# Altium PCB PCB3.PcbDoc
Units mm, origin at the board's own origin, x right, y up, seen from the top; angles counter-clockwise.
Board outline 98 x 98 mm, 2 copper layers (Top Layer, Bottom Layer); 32 components, 44 nets, 143 pads, 17 vias.
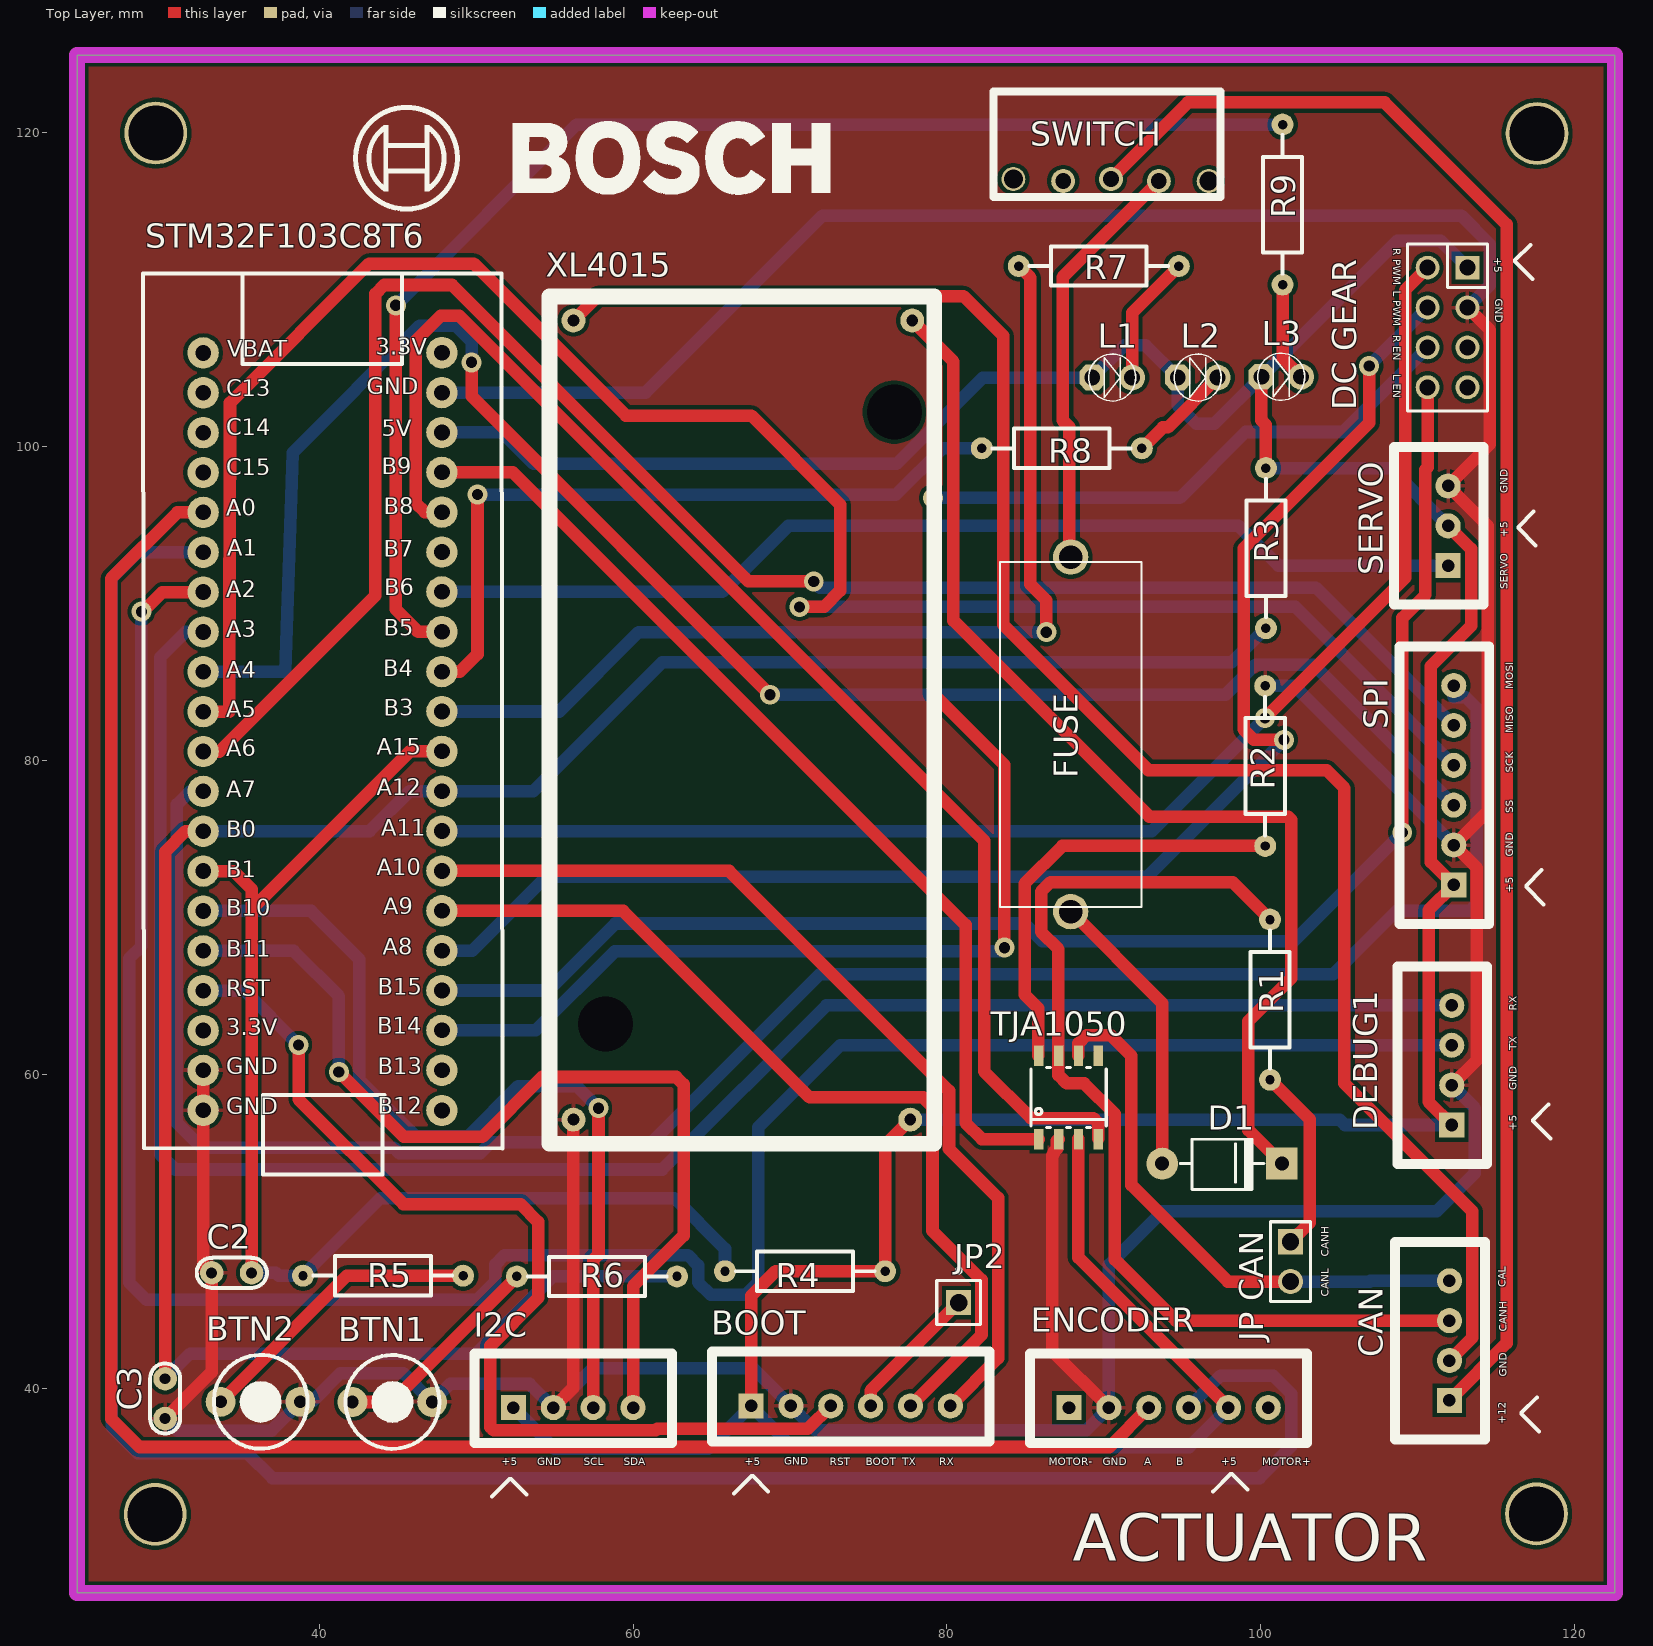
[diagram p0: Top Layer view]
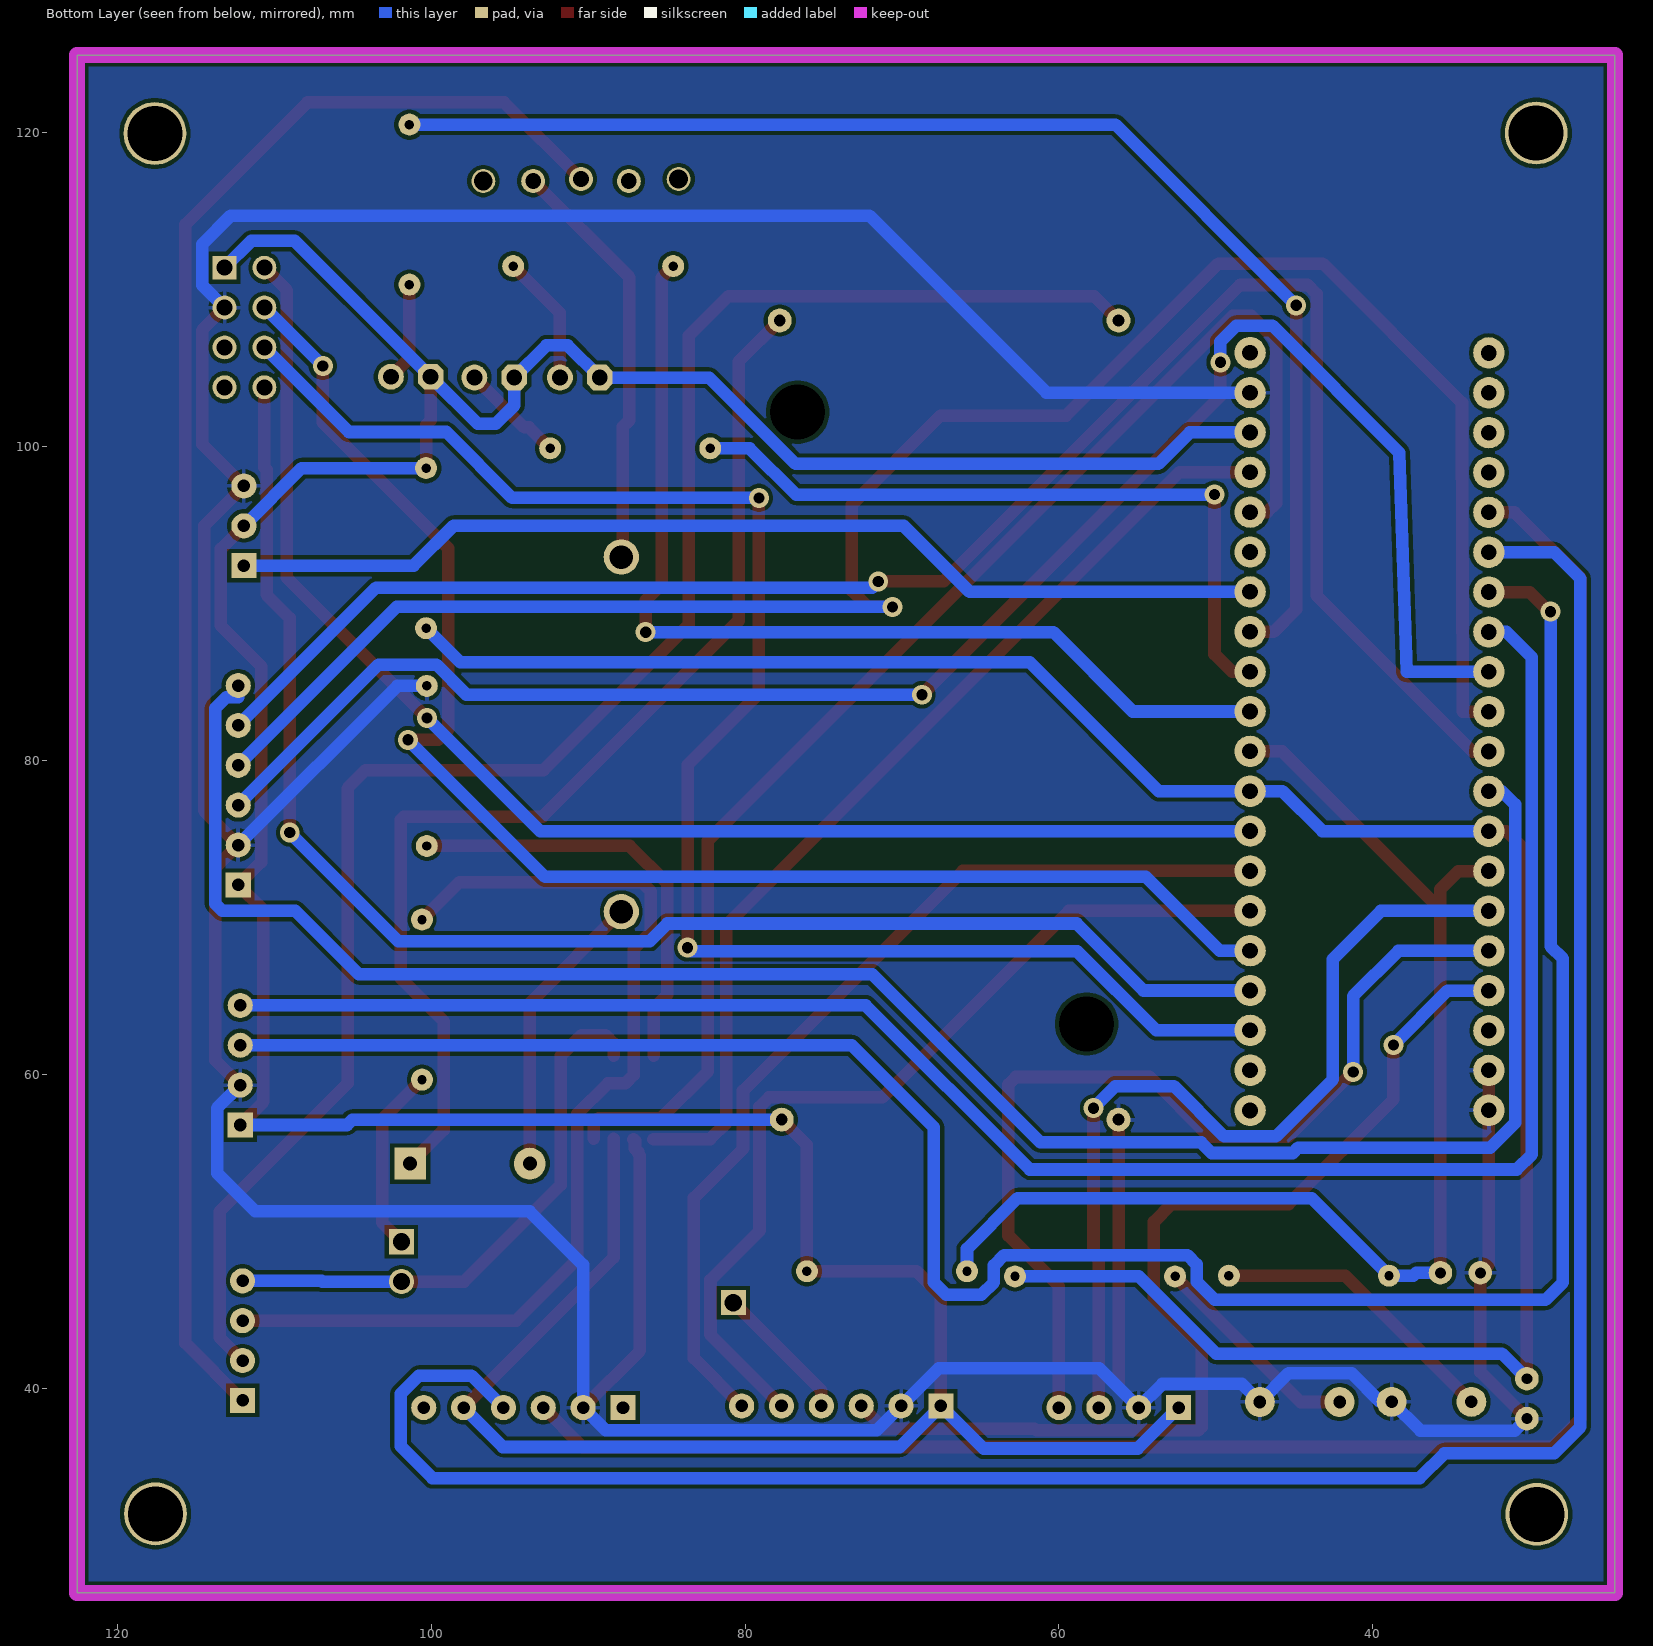
[diagram p1: Bottom Layer view, seen from below]
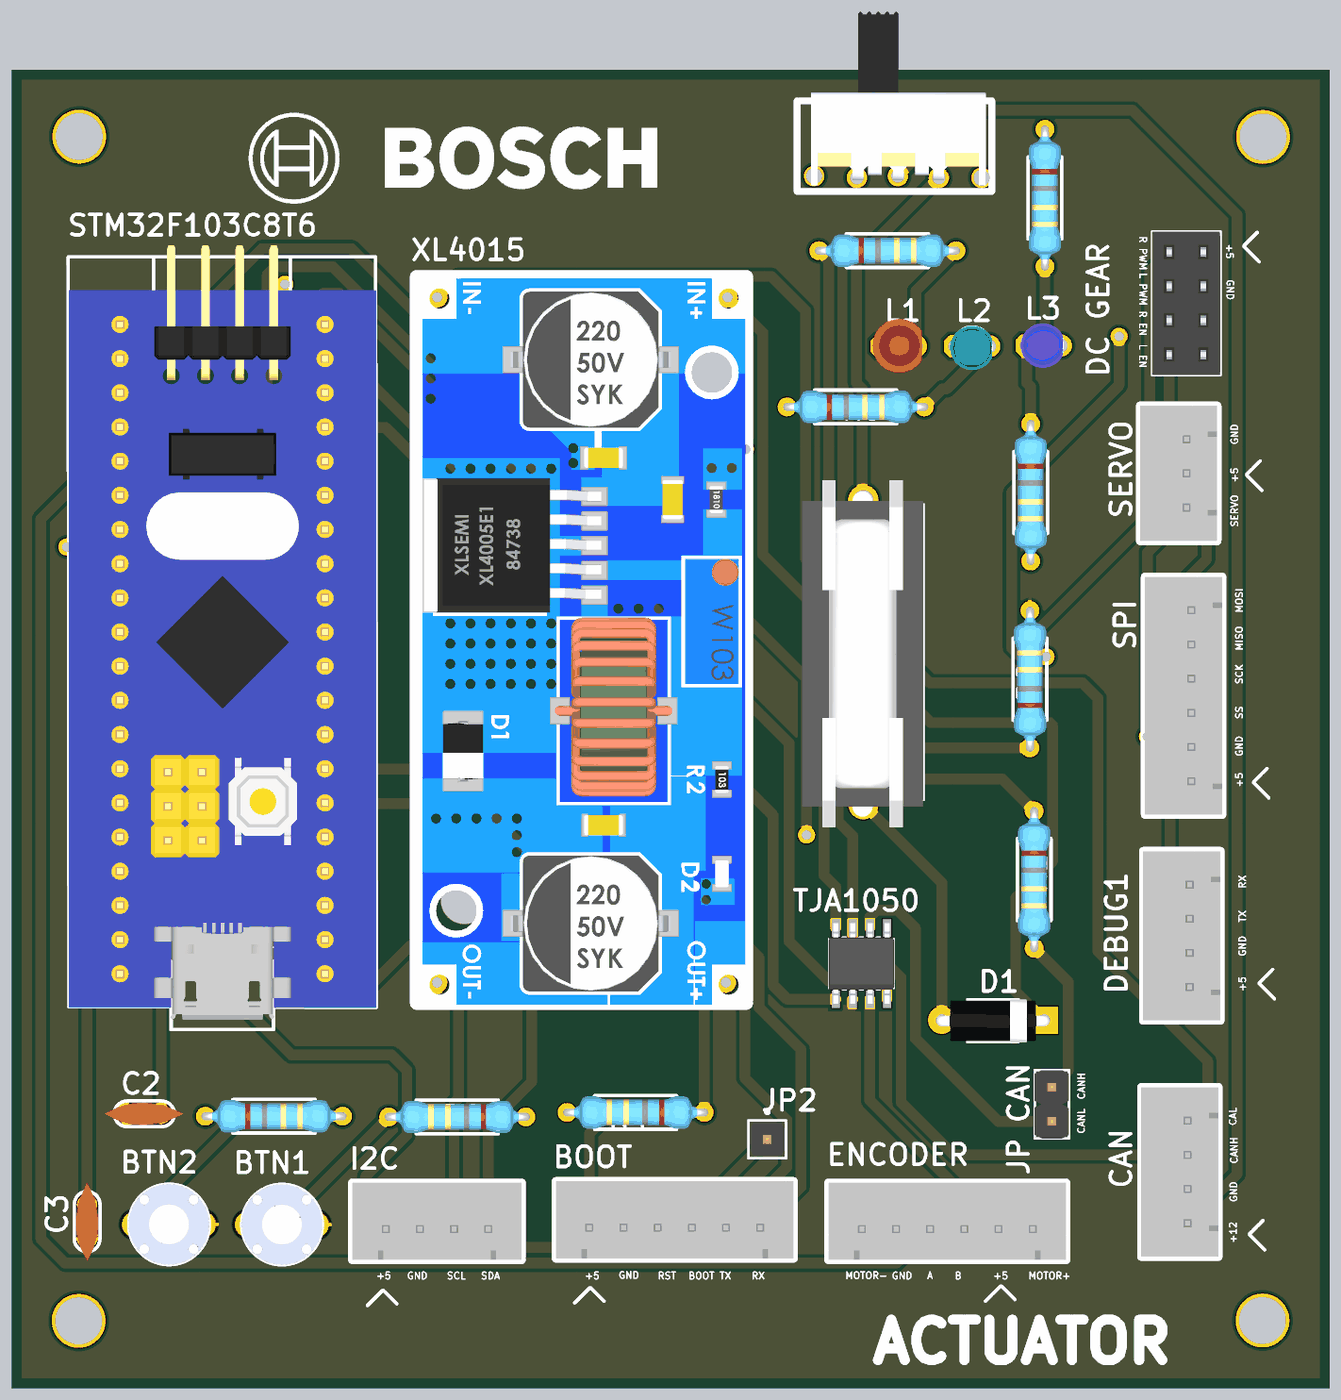
[diagram p2: 3D render of the assembled board from above, using the file's embedded part models]

## Layer stack, top to bottom
Top Solder: solder mask 0.0102, Solder Resist, Dk 3.5
Top Layer: signal copper 0.0356
Dielectric 1: dielectric 0.32, FR-4, Dk 4.8
Bottom Layer: signal copper 0.0356
Bottom Solder: solder mask 0.0102, Solder Resist, Dk 3.5

## Board outline
24.57,26.94 24.57,124.94 122.57,124.94 122.57,26.94

## Design rules (kind name [scope] priority, off if disabled: settings)
Clearance [All] p1: gap=0.254 ignorepadtopadclearanceinfootprint=FALSE
PolygonConnect [All] p1: connectstyle=Relief reliefconductorwidth=0.254 reliefentries=4 polygonreliefangle="90 Angle" airgapwidth=0.254
RoutingVias [All] p1: holewidth=0.711 width=1.27 viastyle="Through Hole" minholewidth=0.711 minwidth=1.27 maxholewidth=0.711 maxwidth=1.27
SolderMaskExpansion [All] p1: expansion=0.102 istentingtop=FALSE
Width [All] p1: maxlimit=2 minlimit=0.254 preferedwidth=0.8
30 further rules are at their usual default settings.

## Components (designator, comment, footprint, x,y, rotation, side; value= is the part's Value field where it differs from the comment)
BOOT "Header 6P" XH2.54M-6 67.52,38.86 r0 top
BTN1 "SW" "BUTTON  ROUND" 44.66,39.11 r180 top
BTN2 "SW" "BUTTON  ROUND" 36.26,39.12 r180 top
C2 "101" "tu gom" 34.42,47.34 r180 top
C3 "101" "tu gom" 30.18,39.32 r270 top
CAN "HEADER 4pin" XH2.54M-4 112.02,39.21 r90 top
D1 "100v" "DIODE 1A" 92.45,54.3 r180 top
"DC GEAR" "JP4x2" JP4-C2T 111.9,107.58 r270 top
DEBUG1 "HEADER 4pin" XH2.54M-4 112.17,56.76 r90 top
ENCODER "Header 6P" XH2.54M-6 87.78,38.75 r0 top
FUSE "Fuse Holder 23mm" Fuse3 87.89,81.65 r270 top
I2C "HEADER 4pin" XH2.54M-4 52.38,38.75 r0 top
JP2 "JP 1x1 2.54" "JP 1x1 DT" 80.75,45.44 r0 top
"JP CAN" "JP 1x2 2.54" "JP 1x2 DT" 101.9,49.32 r270 top
L1 "LED 3mm" LED-3MM-RED 89.26,104.39 r0 top
L2 "LED 3mm" LED-3MM-GREEN 94.71,104.39 r0 top
L3 "LED 3mm" LED-3MM-BLUE 101.43,104.44 r0 top
R1 "120R" "tro vach 1/4w" 100.59,64.75 r90 top
R2 "1k" "tro vach 1/4w" 100.28,79.64 r270 top
R3 "33K" "tro vach 1/4w" 100.33,93.52 r90 top
R4 "33K" "tro vach 1/4w" 70.96,47.44 r0 top
R5 "1K" "tro vach 1/4w" 44.07,47.16 r180 top
R6 "1K" "tro vach 1/4w" 57.7,47.11 r0 top
R7 "4.7K" "tro vach 1/4w" 89.68,111.49 r180 top
R8 "4.7K" "tro vach 1/4w" 87.32,99.88 r180 top
R9 "4.7K" "tro vach 1/4w" 101.39,115.41 r90 top
SERVO "Header 3P" XH2.54M-3 111.94,92.4 r90 top
SPI "Header 6P" XH2.54M-6 112.3,72.06 r90 top
STM32F103C8T6 "STM32F103C8T6" "Stm32 BluePill" 39.992,87.593 r0 top
SWITCH "Slide swich vertical" "SLIDE Switch" 89.568,121.99 r270 top
TJA1050 "TJA1050" SOT96-1 87.75,58.51 r0 top (schematic designator TJA?)
XL4015 "XL4015" XL4015 63.06,79.45 r270 top

## Footprints (in the part's own frame and the unit in brackets; to place one, negate y for a bottom-side part, rotate by r counter-clockwise, add the part's x,y. Pads: shape width x height; smd on the part's side, far side on the other; paste and mask are expansions set on the pad)
"BUTTON  ROUND" [mm]
  round 1.905 / inner round 1.524 / far side round 1.905 hole 0.8 mask+0.205: 1(-2.54,0) 2(2.54,0)
  silkscreen extent -3,-2.99 2.98,2.99, body extent -3,-3 3,3, height 4.5
"DIODE 1A" [mil] "Diode 1A"
  round 80 hole 35: 1(-50,0)
  rect 80x80 hole 35: 2(-350,0)
  silkscreen extent -305,-61 -95,65, body extent -366,-61 -34,65, height 122
Fuse3 [mm] "FUSEHOLDER BLOCKS - PCB - CLIP COVER - THT - WR-FSH"
  round 2.25 hole 1.5: 1(-11.3,0) 2(11.3,0)
  silkscreen extent -11,-4.5 11,4.5, body extent -12.77,-4.56 13.03,4.45, height 4.1
JP4-C2T [mm] "8 pins, dual row, straight, gold plating"
  rect 1.52x1.52 hole 1.02: 1(-3.81,1.27)
  round 1.52 hole 1.02: 2(-1.27,1.27) 3(1.27,1.27) 4(3.81,1.27) 5(3.81,-1.27) 6(1.27,-1.27) 7(-1.27,-1.27) 8(-3.81,-1.27)
  silkscreen extent -5.33,-2.54 5.33,2.54, body extent -5.33,-2.54 5.33,2.54, height 8.51
"JP 1x1 DT" [mm] "1pins, 1 row, straight, gold plating"
  rect 1.6x1.6 hole 1.1: 1(0,0)
  silkscreen extent -1.4,-1.4 1.4,2.17, body extent -1.27,-1.27 1.27,1.27, height 8.54
"JP 1x2 DT" [mm] "2 pins, 1 row, straight, gold plating"
  rect 1.6x1.6 hole 1.1: 1(0,0)
  round 1.6 hole 1.1: 2(2.54,0)
  silkscreen extent -1.27,-1.27 3.81,1.27, body extent -1.27,-1.27 3.81,1.27, height 8.54
LED-3MM-BLUE [mil]
  oct 65x65 hole 40: 1(-55,0)
  round 65 hole 40: 2(45,0)
  silkscreen extent -64,-59 54,59, body extent -72,-65 54,65, height 184
LED-3MM-GREEN [mil]
  oct 65x65 hole 40: 1(0,0)
  round 65 hole 40: 2(100,0)
  silkscreen extent -9,-59 109,59, body extent -15,-70 112,60, height 182
LED-3MM-RED [mil]
  oct 65x65 hole 40: 1(0,0)
  round 65 hole 40: 2(100,0)
  silkscreen extent -9,-59 109,59, body extent -27,-77 117,80, height 181
"SLIDE Switch" [mil]
  round 60 hole 47.24: 0(195,-210) 0(200,280)
  round 60 hole 39.37: 1(200,155) 2(195,35) 3(200,-85)
  silkscreen extent -25,-260 240,310, body extent -286,-219 222,292, height 266
SOT96-1 [mm]
  rect 0.6x1.3 smd: 1(-1.905,-2.65) 2(-0.635,-2.65) 3(0.635,-2.65) 4(1.905,-2.65) 5(1.905,2.65) 6(0.635,2.65) 7(-0.635,2.65) 8(-1.905,2.65)
  silkscreen extent -2.4,-1.9 2.4,1.91, body extent -2.45,-3 2.45,3, height 1.75
"Stm32 BluePill" [mm]
  round 2 hole 1: 1(7.828,-29.908) 2(7.828,-27.343) 3(7.828,-24.803) 4(7.828,-22.263) 5(7.828,-19.723) 6(7.828,-17.183) 7(7.828,-14.643) 8(7.828,-12.103) 9(7.828,-9.563) 10(7.828,-7.023) 11(7.828,-4.483) 12(7.828,-1.943) 13(7.828,0.597) 14(7.828,3.137) 15(7.828,5.677) 16(7.828,8.217) 17(7.828,10.757) 18(7.828,13.297) 19(7.828,15.837) 20(7.828,18.377) 21(-7.386,18.366) 22(-7.386,15.826) 23(-7.386,13.286) 24(-7.386,10.746) 25(-7.386,8.206) 26(-7.386,5.666) 27(-7.386,3.126) 28(-7.386,0.586) 29(-7.386,-1.954) 30(-7.386,-4.494) 31(-7.386,-7.034) 32(-7.386,-9.574) 33(-7.386,-12.114) 34(-7.386,-14.654) 35(-7.386,-17.194) 36(-7.386,-19.734) 37(-7.386,-22.274) 38(-7.386,-24.814) 39(-7.386,-27.354) 40(-7.386,-29.894)
  silkscreen extent -11.22,-34 11.69,23.43, body extent -11.18,-33.27 11.68,24.29, height 12.31
"tro vach 1/4w" [mm]
  round 1.4 hole 0.6: 1(-5.1,0) 2(5.1,0)
  silkscreen extent -4.39,-1.25 4.42,1.25, body extent -5.38,-1.2 5.38,1.2, height 2.41
"tu gom" [mm] "Tu gom mini"
  round 1.5 hole 0.7: 1(-1.27,0) 2(1.27,0)
  silkscreen extent -2.25,-0.97 2.22,0.97, body extent -2.92,-0.85 2.92,0.85, height 6.12
XH2.54M-3 [mm]
  rect 1.6x1.6 hole 0.8: 1(0,0)
  round 1.6 hole 0.8: 2(2.54,0) 3(5.08,0)
  silkscreen extent -2.48,-2.26 7.56,3.46, body extent -2.48,-2.26 7.56,3.48, height 6.91
XH2.54M-4 [mm]
  rect 1.6x1.6 hole 0.8: 1(0,0)
  round 1.6 hole 0.8: 2(2.54,0) 3(5.08,0) 4(7.62,0)
  silkscreen extent -2.48,-2.26 10.1,3.46, body extent -2.48,-2.26 10.1,3.48, height 6.91
XH2.54M-6 [mm]
  rect 1.6x1.6 hole 0.8: 1(0,0)
  round 1.6 hole 0.8: 2(2.54,0) 3(5.08,0) 4(7.62,0) 5(10.16,0) 6(12.7,0)
  silkscreen extent -2.48,-2.26 15.18,3.46, body extent -2.48,-2.26 15.18,3.48, height 6.91
XL4015 [mil]
  round 60 hole 137.8: c(-895,535) "Description  "(640,-190)
  round 60 hole 30: IN+(-1125,580) IN-(-1125,-270) OUT+(880,575) OUT-(880,-270)
  silkscreen extent -1185,-330 940,635, body extent -1181,-313 945,632, height 729

## Part data
BOOT ENCODER SPI: library part "Header 6P 2.54 Duc Thang", "Cắm", Chung_Loai=Cắm, Don_Vi=Con, Ma_Hang=MH001972, Ten_Linh_Kien="Header 6P XH2.54-6P Đực Thẳng"
BTN1 BTN2: library part SW-Button, "Switch-Button", LatestRevisionDate=17-Jul-2002, LatestRevisionNote="Re-released for DXP Platform.", PackageReference=SPST-2, Published=24-Mar-1999, Publisher="Altium Limited"
C2 C3: library part "Tu gom 101 50V", "Cắm", Chung_Loai=Cắm, Don_Vi=Con, Ma_Hang=MH004764, So_Chan=2, Ten_Linh_Kien="Tụ gốm 101 0.1nF 50V"
CAN DEBUG1 I2C: library part "Header 4P 2.54 Duc Thang", "Cắm", Chung_Loai=Cắm, Don_Vi=Con, Ma_Hang=MH001285, Ten_Linh_Kien="Header 4P XH2.54-4P Đực Thẳng"
D1: library part "Diode 1N4007", "Cắm", Chung_Loai=Cắm, Don_Vi=Con, Ma_Hang=MH001063, Ten_Linh_Kien="Diode 1N4007 1A (DIP)"
"DC GEAR": "WR-PHD 2.54 mm Dual Socket Header", Manufacturer="W¨¹rth Elektronik eiSos GmbH", partNo=61300821821, ComponentLink1 Description=Manufacturer, ComponentLink1URL=http://www.we-online.com, ComponentLink2 Description=Datasheet, ComponentLink2URL=http://katalog.we-online.de/em/datasheet/6130xx21821.pdf, Created by="Karrer Zheng", Created Date="29 March 2013", NoPins=08
JP2: library part "JP 1x1 2.54 Duc Cong", "Cắm", Chung_Loai=Cắm, Don_Vi=Con, Ma_Hang=MH000904, Ten_Linh_Kien="Jump Đơn Đực 2.54MM 1x40P Cong Đứng"
"JP CAN": library part "JP 1x2 2.54 Duc Thang", "Cắm", Chung_Loai=Cắm, Don_Vi=Con, Ma_Hang=MH000903, Ten_Linh_Kien="Jump Đơn Đực 2.54MM 1x40P Thẳng 11MM"
L1: library part "LED 3mm Do", "Cắm", Chung_Loai=Cắm, Don_Vi=Con, Ma_Hang=MH003892, Ten_Linh_Kien="Led 3MM Phủ Đỏ (10c)"
L2: library part "LED 3mm Xanh La", "Cắm", Chung_Loai=Cắm, Don_Vi=Con, Ma_Hang=MH001054, Ten_Linh_Kien="Led 3MM Phủ Xanh (10c)"
L3: library part "LED 3mm Xanh Duong", "Cắm", Chung_Loai=Cắm, Don_Vi=Con, Ma_Hang=MH009003, Ten_Linh_Kien="LED 3MM Xanh Dương SS (1000c)"
R1: library part "Tro Vach 1/4W 5% 120R", "Cắm", Chung_Loai=Cắm, Don_Vi=Con, Ma_Hang=MH007388, So_Chan=2, Ten_Linh_Kien="Trở Vạch 1/4W 5% 120R"
R2 R5 R6: library part "Tro Vach 1/4W 5% 1k", "Cắm", Chung_Loai=Cắm, Don_Vi=Con, Ma_Hang=MH007390, So_Chan=2, Ten_Linh_Kien="Trở Vạch 1/4w 5% 1k"
R3 R4: library part "Tro Vach 1/4W 5% 33k", "Cắm", Chung_Loai=Cắm, Don_Vi=Con, Ma_Hang=MH007313, So_Chan=2, Ten_Linh_Kien="Trở Vạch 1/4w 5% 33k"
R7 R8 R9: library part "Tro Vach 1/4W 1% 4.7k", "Cắm", Chung_Loai=Cắm, Don_Vi=Con, Ma_Hang=MH006350, So_Chan=2, Ten_Linh_Kien="Trở Vạch 1/4w 1% 4.7k"
SERVO: library part "Header 3P 2.54 Duc Thang", "Cắm", Chung_Loai=Cắm, Don_Vi=Con, Ma_Hang=MH001292, Ten_Linh_Kien="Header 3P XH2.54-3P Đực Thẳng"
STM32F103C8T6: library part BluePill, "Designed By @Alixahedi"
TJA1050: "1/1 Transceiver Half CANbus 8-SO", Package="SOIC-8 NXP USA", Availability=Unavailable, MF="NXP USA", MP=TJA1050, Price=None, SnapEDA_Link=https://www.snapeda.com/parts/TJA1050/NXP%20USA%20Inc./view-part/562764/?ref=snap

## Free pads (board coordinates)
  round 4 hole 3.5: 10(29.59,119.97) 11(29.55,31.95) 12(117.57,31.98) 13(117.61,119.94)

## Via types
v1: diameter 1.27, hole 0.711, Top Layer to Bottom Layer, 17 vias

## Nets (pads, with @x,y where several pads share a name; then routed paths per layer and width w, separated by ;. In a path a pad name is that pad's centre, name@x,y a point inside that pad or via, vN(x,y) a via of type N, cw(c..) or ccw(c..) an arc to the next point about the centre after c; other vN are vias at no path point)
12_GND: CAN.2 XL4015.IN- | length 114
  Top Layer w0.8: XL4015.IN- 57.753,109.576 81.051,109.576 83.591,107.036 83.591,88.627 92.843,79.375 104.191,79.375 105.334,78.232 105.334,59.411 113.487,51.257 113.487,43.217 CAN.2
12_VIN: CAN.1 SWITCH.2 | length 106.9
  Top Layer w0.8: SWITCH.2 95.35,121.93 107.889,121.93 115.672,114.148 115.672,42.862 CAN.1
12V: D1.1 FUSE.2 | length 18.6
  Top Layer w0.8: FUSE.2@87.8,70.45 93.72,64.53 D1.1
+5: "DC GEAR.1" BOOT.1 DEBUG1.1 ENCODER.5 I2C.1 L1.1 L2.1 L3.1 R3.2 R4.2 SERVO.2 SPI.1 STM32F103C8T6.18 TJA1050.3 XL4015.OUT+ | length 270.9
  Top Layer w0.8: BOOT.1 67.52,45.872 69.088,47.44 R4.2 76.06,55.493 XL4015.OUT+ ; TJA1050.3@88.373,55.879 88.373,48.317 ENCODER.5 ; L3.1 100.033,101.668 100.33,101.371 R3.2 ; SERVO.2 113.411,93.469 113.411,88.57 110.846,86.004 110.846,73.514 SPI.1 110.693,70.453 110.693,58.237 DEBUG1.1
  Bottom Layer w0.8: STM32F103C8T6.18 51.662,100.89 53.67,98.882 76.784,98.882 82.292,104.39 L1.1 91.305,106.435 92.665,106.435 L2.1 94.71,102.616 95.878,101.448 97.041,101.448 L3.1 108.699,113.106 111.454,113.106 113.17,111.39 ; I2C.1 54.986,36.144 64.804,36.144 BOOT.1 70.138,36.242 95.432,36.242 ENCODER.5 ; XL4015.OUT+ 105.03,57.098 105.368,56.76 DEBUG1.1 ; R3.2 108.26,98.62 SERVO.2
BOOT0_MCU2: BOOT.4 JP2.1 | length 8.9
  Top Layer w0.8: BOOT.4 75.14,39.83 JP2.1
BTN1_MCU2: C3.1 R3.1 R6.2 STM32F103C8T6.9 STM32F103C8T6.33 | length 144.9
  Top Layer w0.8: C3.1 30.18,74.163 31.496,75.479 STM32F103C8T6.33
  Bottom Layer w0.8: C3.1 31.779,42.189 49.987,42.189 54.908,47.11 R6.2 ; STM32F103C8T6.33 43.22,75.479 45.771,78.03 STM32F103C8T6.9 53.645,78.03 61.848,86.233 98.143,86.233 R3.1
BTN2_MCU2: C2.1 R4.1 R5.2 STM32F103C8T6.10 STM32F103C8T6.34 | length 79.4
  Top Layer w0.8: STM32F103C8T6.34 34.544,72.939 35.69,71.793 35.69,70.489 ; C2.1 35.69,70.489 ; STM32F103C8T6.10 45.771,80.57 35.69,70.489
  Bottom Layer w0.8: C2.1 37.236,47.34 37.416,47.16 R5.2 43.905,52.095 62.631,52.095 65.86,48.866 R4.1
CAN_RX_MCU2: STM32F103C8T6.16 TJA1050.4 | length 87.3
  Top Layer w0.8: STM32F103C8T6.16 46.736,95.81 46.152,96.394 46.152,106.731 47.752,108.331 48.92,108.331 82.372,74.879 82.372,60.172 85.344,57.201 89.338,57.201 89.643,56.896 TJA1050.4@89.643,55.879
CAN_TX_MCU2: STM32F103C8T6.17 TJA1050.1 | length 63
  Top Layer w0.8: STM32F103C8T6.17 52.348,98.35 81.189,69.509 81.189,56.896 82.225,55.86 TJA1050.1
CANH: CAN.3 R1.2 TJA1050.7 | length 64.8
  Top Layer w0.8: R1.2 98.202,72.238 86.614,72.238 86.011,71.634 86.011,69.062 87.103,67.97 87.103,61.179 87.103,59.944 87.636,59.411 88.748,59.411 90.697,57.461 90.697,48.19 94.597,44.29 CAN.3
CANL: "JP CAN.2" CAN.4 TJA1050.6 | length 36
  Top Layer w0.8: TJA1050.6@88.373,61.179 88.373,61.955 88.9,62.483 90.424,62.483 91.751,61.156 91.751,52.928 97.898,46.78 101.9,46.78
  Bottom Layer w0.8: 101.9,46.78 106.934,46.78 106.984,46.83 CAN.4
Debug_UART_RX_1: DEBUG1.4 STM32F103C8T6.28 | length 122.1
  Bottom Layer w0.8: STM32F103C8T6.28 31.496,88.179 29.87,86.554 29.87,54.889 30.837,53.923 61.858,53.923 72.316,64.38 DEBUG1.4
Debug_UART_TX_1: DEBUG1.3 STM32F103C8T6.27 | length 148.1
  Top Layer w0.8: v1(28.67,89.47) 28.767,89.47 30.016,90.719 STM32F103C8T6.27
  Bottom Layer w0.8: v1(28.67,89.47) 28.67,68.141 27.889,67.36 27.889,46.736 29.007,45.618 50.063,45.618 51.232,46.787 51.232,47.88 51.816,48.464 63.5,48.464 64.154,47.81 64.154,46.736 64.941,45.949 67.183,45.949 67.97,46.736 67.97,56.613 73.198,61.84 DEBUG1.3
EncoderA: ENCODER.3 STM32F103C8T6.25 | length 129
  Top Layer w0.8: STM32F103C8T6.25 30.963,95.799 26.74,91.577 26.74,38.055 28.553,36.242 90.352,36.242 ENCODER.3
EncoderB: ENCODER.4 STM32F103C8T6.26 | length 149.2
  Bottom Layer w0.8: STM32F103C8T6.26 28.448,93.259 26.77,91.581 26.77,37.517 28.448,35.839 35.433,35.839 37.012,34.26 99.919,34.26 101.956,36.297 101.956,39.624 100.787,40.792 97.442,40.792 ENCODER.4
GND: "DC GEAR.2" BOOT.2 BTN1.1 BTN2.1 C2.2 C3.2 DEBUG1.2 ENCODER.2 I2C.2 R2.1 SERVO.3 SPI.2 STM32F103C8T6.19 STM32F103C8T6.39 STM32F103C8T6.40 TJA1050.2 XL4015.OUT- | length 317
  Top Layer w0.8: C3.2 33.15,41.02 C2.2 32.605,47.885 STM32F103C8T6.40 STM32F103C8T6.39 ; I2C.2 56.202,40.032 XL4015.OUT- ; TJA1050.2 87.015,55.76 87.015,55.257 86.799,55.041 86.799,54.939 86.703,54.844 86.703,42.367 ENCODER.2 ; DEBUG1.2 113.767,60.897 113.767,73.133 SPI.2 114.478,76.778 114.478,94.942 SERVO.3 114.605,100.145 114.605,107.415 113.17,108.85
  Bottom Layer w0.8: C3.2 30.943,37.287 36.967,37.287 BTN2.1 39.526,39.12 41.351,40.945 45.365,40.945 BTN1.1 48.349,40.259 53.411,40.259 I2C.2 57.42,41.25 67.67,41.25 71.624,37.296 88.866,37.296 ENCODER.2 90.32,47.851 93.726,51.257 111.201,51.257 113.64,53.696 113.64,57.83 DEBUG1.2 ; STM32F103C8T6.19 60.809,103.43 72.085,114.706 112.776,114.706 114.605,112.878 114.605,110.285 113.17,108.85 ; R2.1 102.16,84.74 SPI.2
I2C_SCL: I2C.3 STM32F103C8T6.35 | length 56.8
  Top Layer w0.8: I2C.3 57.46,48.165 57.8,48.505 v1(57.8,57.83)
  Bottom Layer w0.8: STM32F103C8T6.35 39.481,70.399 42.545,67.335 42.545,59.663 46.177,56.031 49.479,56.031 52.681,59.233 56.397,59.233 v1(57.8,57.83)
I2C_SDA: I2C.4 STM32F103C8T6.36 | length 62.1
  Top Layer w0.8: v1(41.25,60.147) 45.39,56.007 50.394,56.007 54.204,59.817 62.752,59.817 63.221,59.348 63.221,49.709 60,46.488 I2C.4
  Bottom Layer w0.8: STM32F103C8T6.36 38.364,67.859 41.25,64.973 v1(41.25,60.147)
L_En: "DC GEAR.5" STM32F103C8T6.4 | length 95.3
  Top Layer w0.8: v1(109.017,75.39) 109.017,89.078 110.486,90.547 110.486,98.527 110.63,98.671 110.63,103.77
  Bottom Layer w0.8: STM32F103C8T6.4 54.611,65.33 58.88,69.598 84.95,69.598 86.07,68.478 102.105,68.478 v1(109.017,75.39)
L_PWM: "DC GEAR.7" STM32F103C8T6.5 | length 93.8
  Top Layer w0.8: v1(101.473,81.305) 99.568,81.305 98.908,81.966 98.908,93.497 106.909,101.498 v1(106.909,105.129)
  Bottom Layer w0.8: STM32F103C8T6.5 49.76,67.87 54.458,72.568 92.735,72.568 v1(101.473,81.305) ; v1(106.909,105.129) 110.63,108.85
LEDB_MCU2: R9.2 STM32F103C8T6.13 | length 84.2
  Top Layer w0.8: v1(44.882,108.991) 44.882,89.611 46.303,88.19 STM32F103C8T6.13
  Bottom Layer w0.8: v1(44.882,108.991) 56.4,120.51 R9.2
LEDG_MCU2: R8.2 STM32F103C8T6.12 | length 46.2
  Top Layer w0.8: STM32F103C8T6.12 48.97,85.65 50.089,86.769 v1(50.089,96.926)
  Bottom Layer w0.8: v1(50.089,96.926) 76.751,96.926 79.704,99.88 R8.2
LEDR_MCU2: R7.2 STM32F103C8T6.11 | length 64.7
  Top Layer w0.8: R7.2 85.319,110.751 85.319,91.211 86.335,90.195 v1(86.335,88.163)
  Bottom Layer w0.8: STM32F103C8T6.11 55.297,83.11 60.35,88.163 v1(86.335,88.163)
MOTOR+: ENCODER.6
MOTOR-: ENCODER.1
NetBTN1_2: BTN1.2 R6.1 | length 13.8
  Top Layer w0.8: BTN1.2 44.6,39.11 R6.1
NetBTN2_2: BTN2.2 R5.1 | length 18.8
  Top Layer w0.8: BTN2.2 41.76,47.16 R5.1
NetD1_2: D1.2 XL4015.IN+ | length 70.9
  Top Layer w0.8: XL4015.IN+ 80.416,105.401 80.416,88.9 92.9,76.416 101.74,76.416 101.956,76.2 101.956,66.116 99.212,63.373 99.212,56.428 D1.2
NetFUSE_1: FUSE.1 SWITCH.1 | length 26.6
  Top Layer w0.8: FUSE.1@87.8,93.05 87.8,101.244 87.376,101.668 87.376,110.781 SWITCH.1
"NetJP CAN_1": "JP CAN.1" R1.1 | length 11.9
  Top Layer w0.8: R1.1 103.124,57.116 103.124,50.544 101.9,49.32
NetL1_2: L1.2 R7.1 | length 8.3
  Top Layer w0.8: L1.2 91.8,108.51 R7.1
NetL2_2: L2.2 R8.1 | length 6.7
  Top Layer w0.8: R8.1 93.759,101.219 94.079,101.219 L2.2
NetL3_2: L3.2 R9.1 | length 6.4
  Top Layer w0.8: R9.1 101.39,105.623 L3.2
NetR2_2: R2.2 TJA1050.8 | length 27.6
  Top Layer w0.8: TJA1050.8@85.833,61.179 85.833,64.194 84.957,65.07 84.957,72.142 87.354,74.54 R2.2
R_En: "DC GEAR.6" STM32F103C8T6.3 | length 104.1
  Top Layer w0.8: v1(79.121,96.723) 79.121,84.252 83.668,79.705 v1(83.668,68.059)
  Bottom Layer w0.8: STM32F103C8T6.3 53.797,62.79 58.838,67.831 83.439,67.831 v1(83.668,68.059) ; v1(79.121,96.723) 94.844,96.723 99.04,100.92 105.24,100.92 110.63,106.31
R_PWM: "DC GEAR.8" STM32F103C8T6.8 | length 88.4
  Top Layer w0.8: v1(100.279,82.702) 109.195,91.618 109.195,109.955 110.63,111.39
  Bottom Layer w0.8: STM32F103C8T6.8 93.067,75.49 v1(100.279,82.702)
RST_MCU2: BOOT.3 STM32F103C8T6.37 | length 66.3
  Top Layer w0.8: v1(38.684,61.865) 38.684,58.395 45.364,51.714 52.832,51.714 53.954,50.592 53.954,45.745 50.902,42.693 50.902,37.516 51.121,37.296 61.443,37.296 61.553,37.406 71.146,37.406 BOOT.3
  Bottom Layer w0.8: STM32F103C8T6.37 35.23,65.319 v1(38.684,61.865)
RX_MCU: BOOT.6 STM32F103C8T6.7 | length 60.7
  Top Layer w0.8: STM32F103C8T6.7 66.113,72.95 80.135,58.928 80.135,55.245 83.258,52.122 83.258,41.898 BOOT.6
Servo_PWM: SERVO.1 STM32F103C8T6.14 | length 66.9
  Bottom Layer w0.8: STM32F103C8T6.14 65.684,90.73 69.9,94.945 98.577,94.945 101.123,92.4 SERVO.1
SPI1_MISO: SPI.5 STM32F103C8T6.31 | length 114.9
  Top Layer w0.8: STM32F103C8T6.31 33.645,80.559 43.574,90.488 43.574,109.728 44.134,110.288 48.462,110.288 67.348,91.402 v1(71.514,91.402)
  Bottom Layer w0.8: v1(71.514,91.402) 71.907,91.008 103.512,91.008 SPI.5
SPI1_MOSI: SPI.6 STM32F103C8T6.32 | length 127.5
  Bottom Layer w0.8: STM32F103C8T6.32 31.775,78.019 30.937,77.181 30.937,56.896 32.512,55.321 44.755,55.321 45.099,54.977 50.267,54.977 50.941,55.651 61.189,55.651 71.908,66.37 104.623,66.37 108.661,70.409 113.309,70.409 113.767,70.866 113.767,83.312 113.055,84.023 112.3,84.023 SPI.6
SPI1_SCK: SPI.4 STM32F103C8T6.30 | length 124.6
  Top Layer w0.8: STM32F103C8T6.30 34.265,83.099 34.315,102.779 43.18,111.643 49.85,111.643 59.538,101.956 67.539,101.956 73.203,96.291 73.203,90.805 72.172,89.774 v1(70.612,89.774)
  Bottom Layer w0.8: v1(70.612,89.774) 102.206,89.774 SPI.4
SPI1_SS: SPI.3 STM32F103C8T6.29 | length 112.8
  Top Layer w0.8: v1(49.708,105.359) 49.708,103.2 v1(68.732,84.176)
  Bottom Layer w0.8: STM32F103C8T6.29 37.846,85.639 38.303,99.593 46.406,107.696 48.692,107.696 49.708,106.68 v1(49.708,105.359) ; v1(68.732,84.176) 97.758,84.176 99.676,86.094 103.346,86.094 SPI.3
TX_MCU: BOOT.5 STM32F103C8T6.6 | length 58.7
  Top Layer w0.8: STM32F103C8T6.6 59.359,70.41 71.255,58.514 78.479,58.514 79.081,57.912 79.081,50.017 82.204,46.894 82.204,43.384 BOOT.5
pads on no net: "DC GEAR.3" "DC GEAR.4" "XL4015.Description  " STM32F103C8T6.1 STM32F103C8T6.2 STM32F103C8T6.15 STM32F103C8T6.20 STM32F103C8T6.21 STM32F103C8T6.22 STM32F103C8T6.23 STM32F103C8T6.24 STM32F103C8T6.38 SWITCH.0 SWITCH.3 TJA1050.5 XL4015.c

## Polygon pours and split planes (outlines as drawn)
GND on Bottom Layer "GND_L02_P000" (solid, remove dead copper, pour order 0): 24.72,124.88 122.64,124.88 122.64,27.48 122.05,26.89 24.81,26.89
GND on Top Layer "GND_L01_P001" (solid, remove dead copper, pour order 1): 24.64,124.78 122.29,124.78 122.37,124.7 122.37,27.14 24.98,27.14 24.55,26.71

## Keep-outs
Keep-Out Layer:
  the board outline again, w1

## Silkscreen, mask and mechanical layers (free items; w line width, h text height)
Top Overlay:
  drawing of 39 lines, arcs and shapes, not listed
  text "R PWM" at 108.45,112.64 h0.5 r270
  text "+5" at 114.88,112.05 h0.5 r270
  text "L PWM" at 108.45,109.91 h0.5 r270
  text "GND" at 114.93,109.42 h0.5 r270
  text "R EN" at 108.43,107.08 h0.5 r270
  text "L EN" at 108.43,104.61 h0.5 r270
  text "GND" at 115.73,97.02 h0.5 r90
  text "+5" at 115.73,94.21 h0.5 r90
  text "SERVO" at 115.73,90.9 h0.5 r90
  text "MOSI" at 116.08,84.52 h0.5 r90
  text "MISO" at 116.08,81.71 h0.5 r90
  text "SCK" at 116.08,79.22 h0.5 r90
  text "SS" at 116.08,76.62 h0.5 r90
  text "GND" at 116.08,73.84 h0.5 r90
  text "+5" at 116.08,71.55 h0.5 r90
  text "RX" at 116.31,64.03 h0.5 r90
  text "TX" at 116.31,61.53 h0.5 r90
  text "GND" at 116.31,58.98 h0.5 r90
  text "+5" at 116.31,56.38 h0.5 r90
  text "CANH" at 104.34,48.35 h0.5 r90
  text "CAL" at 115.6,46.41 h0.5 r90
  text "CANL" at 104.33,45.8 h0.5 r90
  text "CANH" at 115.69,43.57 h0.5 r90
  text "GND" at 115.66,40.72 h0.5 r90
  text "+12" at 115.62,37.68 h0.5 r90
  text "GND" at 69.63,35.11 h0.5
  text "+5" at 51.62,35.07 h0.5
  text "GND" at 53.9,35.07 h0.5
  text "SCL" at 56.87,35.07 h0.5
  text "SDA" at 59.4,35.07 h0.5
  text "+5" at 67.12,35.07 h0.5
  text "RST" at 72.55,35.07 h0.5
  text "BOOT" at 74.82,35.07 h0.5
  text "TX" at 77.14,35.07 h0.5
  text "RX" at 79.52,35.07 h0.5
  text "MOTOR-" at 86.49,35.09 h0.5
  text "GND" at 89.94,35.07 h0.5
  text "A" at 92.57,35.09 h0.5
  text "B" at 94.63,35.07 h0.5
  text "+5" at 97.49,35.07 h0.5
  text "MOTOR+" at 100.11,35.07 h0.5
  text "ACTUATOR" at 88.03,28.99 h3

## Text inside footprints (layer, text, board x,y; h text height)
STM32F103C8T6: Top Overlay "B12" at 43.741,57.138 h1.78; Top Overlay "GND" at 34.079,57.082 h1.78; Top Overlay "B13" at 43.731,59.647 h1.78; Top Overlay "GND" at 34.079,59.647 h1.78; Top Overlay "A1" at 34.15,92.673 h1.78; Top Overlay "A0" at 34.079,95.233 h1.78; Top Overlay "C14" at 34.079,100.364 h1.78; Top Overlay "C13" at 34.079,102.853 h1.78; Top Overlay "C15" at 34.079,97.798 h1.78; Top Overlay "B6" at 44.142,90.153 h1.78; Top Overlay "B4" at 44.079,85.002 h1.78; Top Overlay "B7" at 44.112,92.622 h1.78; Top Overlay "B14" at 43.71,62.218 h1.78; Top Overlay "B5" at 44.112,87.587 h1.78; Top Overlay "VBAT" at 34.151,105.373 h1.78; Top Overlay "A10" at 43.677,72.322 h1.78; Top Overlay "A12" at 43.677,77.408 h1.78; Top Overlay "A15" at 43.677,79.993 h1.78; Top Overlay "A9" at 44.079,69.833 h1.78; Top Overlay "B3" at 44.112,82.482 h1.78; Top Overlay "A11" at 43.964,74.842 h1.78; Top Overlay "A8" at 44.048,67.267 h1.78; Top Overlay "B15" at 43.741,64.702 h1.78; Top Overlay "3.3V" at 34.079,62.137 h1.78; Top Overlay "B1" at 34.079,72.201 h1.78; Top Overlay "B0" at 34.079,74.76 h1.78; Top Overlay "A7" at 34.079,77.306 h1.78; Top Overlay "A6" at 34.079,79.891 h1.78; Top Overlay "B11" at 34.079,67.146 h1.78; Top Overlay "B10" at 34.079,69.731 h1.78; Top Overlay "RST" at 34.079,64.6 h1.78; Top Overlay "A4" at 34.079,84.901 h1.78; Top Overlay "A3" at 34.079,87.486 h1.78; Top Overlay "A2" at 34.079,90.031 h1.78; Top Overlay "A5" at 34.079,82.38 h1.78; Top Overlay "GND" at 43.04,102.98 h1.78; Top Overlay "3.3V" at 43.604,105.494 h1.78; Top Overlay "B8" at 44.112,95.334 h1.78; Top Overlay "B9" at 43.985,97.874 h1.78; Top Overlay "5V" at 43.985,100.287 h1.78